# Altium PCB version_2.PcbDoc
Units mil, origin at the board's own origin, x right, y up, seen from the top; angles counter-clockwise.
Board outline 3930.36 x 2285 mil, 2 copper layers (Top Layer, Bottom Layer); 63 components, 60 nets, 290 pads, 52 vias.
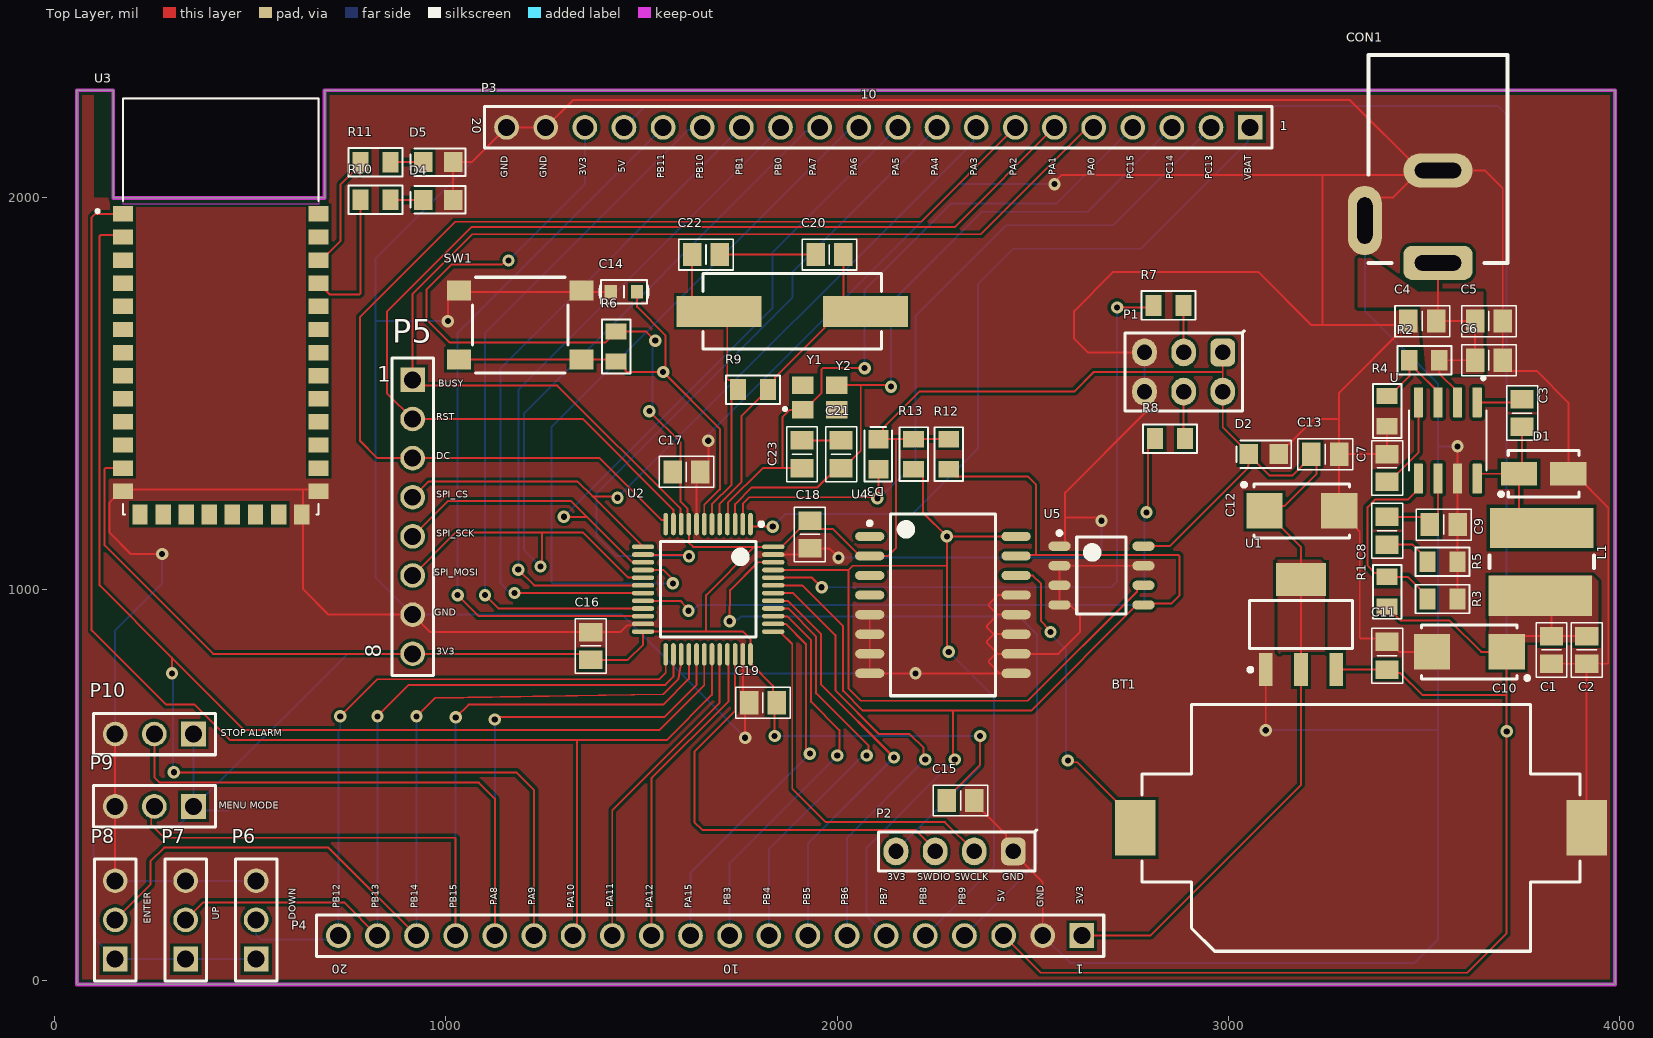
[diagram p0: Top Layer view]
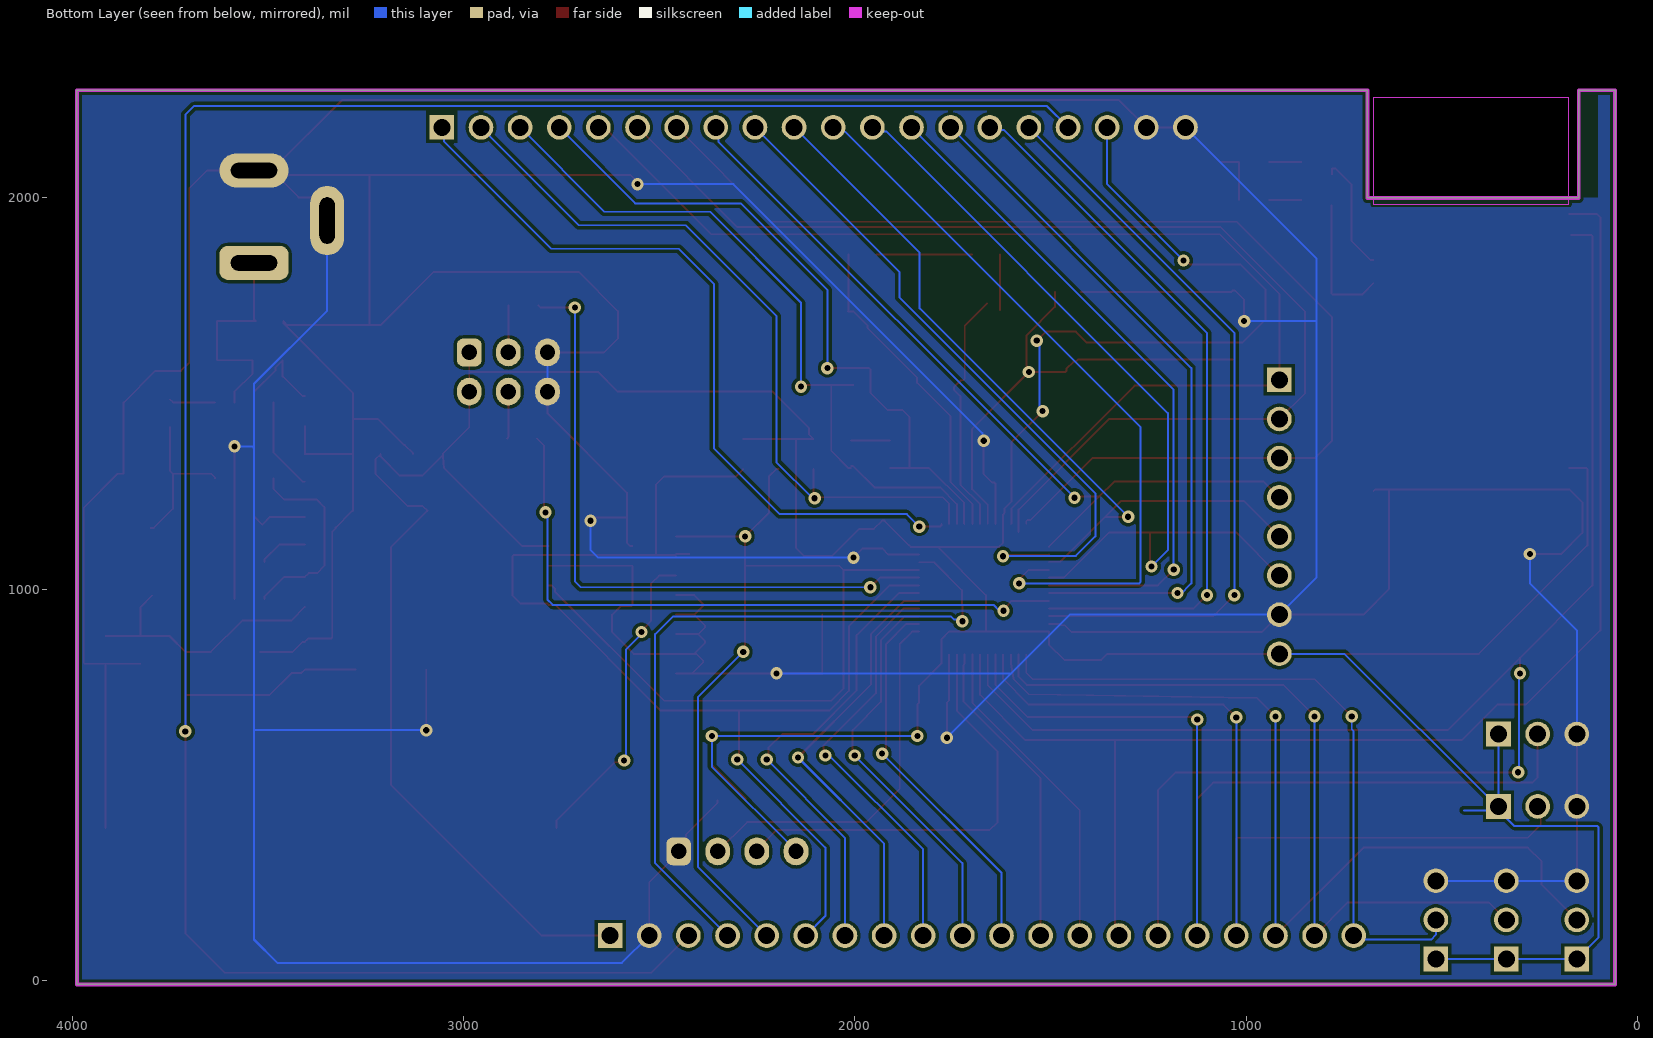
[diagram p1: Bottom Layer view, seen from below]

## Layer stack, top to bottom
Top Solder: solder mask 0.4, Solder Resist, Dk 3.5
Top Layer: signal copper 1.4
Dielectric 1: dielectric 12.6, FR-4, Dk 4.8
Bottom Layer: signal copper 1.4
Bottom Solder: solder mask 0.4, Solder Resist, Dk 3.5

## Board outline
57.14,-10 57.14,2275 150,2275 150,2000 690,2000 690,2275 3987.5,2275 3987.5,-10

## Design rules (kind name [scope] priority, off if disabled: settings)
Clearance [All] p1: gap=8 ignorepadtopadclearanceinfootprint=TRUE
PolygonConnect [All] p1: connectstyle=Direct reliefconductorwidth=10 reliefentries=4 polygonreliefangle="90 Angle" airgapwidth=10
RoutingVias [All] p1: holewidth=15.75 width=31.5 viastyle="Through Hole" minholewidth=15.75 minwidth=31.5 maxholewidth=15.75 maxwidth=31.5
SolderMaskExpansion [All] p1: expansion=4 istentingtop=FALSE
Width [All] p1: maxlimit=50 minlimit=5 preferedwidth=10
30 further rules are at their usual default settings.

## Classes and differential pairs
component class 06_I2C_DS3231: BT1 R12 R13 U4 U5
component class 05_Uart_Bluetooth: D4 D5 P5 P6 P7 P8 P9 P10 R10 R11 U3
component class 04: C14 C15 C16 C17 C18 C19 C20 C21 C22 C23 D2 D3 P1 P2 P3 P4 R6 R7 R8 R9 SW1 U2 Y1 Y2
component class 03_Power_supply: C1 C2 C3 C4 C5 C6 C7 C8 C9 C10 C11 C12 C13 CON1 D1 L1 R1 R2 R3 R4 R5 U U1

## Components (designator, comment, footprint, x,y, rotation, side; value= is the part's Value field where it differs from the comment)
BT1 "79527141" 79527141 3338.23,390 r180 top
C1 "47uF" "C 0805" 3825,845 r90 top
C2 "47uF" "C 0805" 3915,845 r90 top
C3 "0.1uF" "C 0805" 3750,1450 r90 top
C4 "10uf" "C 0805" 3495,1685 r0 top
C5 "10uf" "C 0805" 3665,1685 r180 top
C6 "0.01uF" "C 0805" 3665,1585 r180 top
C7 "0.01uF" "C 0805" 3405,1310 r270 top
C8 "1000pF" "C 0805" 3405,1149.57 r90 top
C9 "47pF" "C 0805" 3549.57,1165 r180 top
C10 "22uF" "C SMD TAN 2312 (C)" 3615,840 r180 top
C11 "100nF" "C 0805" 3405,830 r270 top
C12 "22uF" "C SMD TAN 2312 (C)" 3186.97,1200 r0 top
C13 "100nF" "C 0805" 3247.01,1345 r180 top
C14 "C" "C 0603" 1455,1760 r180 top
C15 "104" "C 0805" 2315,460 r0 top
C16 "104" "C 0805" 1370,855 r270 top
C17 "104" "C 0805" 1614.57,1300 r180 top
C18 "104" "C 0805" 1930,1140 r90 top
C19 "104" "C 0805" 1810,710 r0 top
C20 "20p" "C 0805" 1980,1855 r180 top
C21 "20p" "C 0805" 2010,1345 r90 top
C22 "20p" "C 0805" 1664.57,1855 r0 top
C23 "20p" "C 0805" 1910,1345 r90 top
CON1 "CON DC PWR" CONN/DC/PWR/5.0MM 3535,1833.78 r270 top
D1 "SS54F" "DO-214AC (SMA)" 3805,1295 r180 top
D2 "Led" "Led 0805" 3090,1345 r0 top
D3 "Led" "Led 0805" 2105,1345 r270 top
D4 "Led" "Led 0805" 980,1995 r0 top
D5 "Led" "Led 0805" 980,2091.22 r0 top
L1 "10uh" "Inductor SMD CDRH3D67" 3800,1070 r270 top
P1 "Header 3X2" HDR/Header/6/DL 2885,1555 r180 top
P2 "Header 4" HDR/Header/4 2300,330 r180 top
P3 "3A, 250 V (AC)" 61302011121 2105,2180 r180 top
P4 "3A, 250 V (AC)" 61302011121 1675,115 r180 top
P5 "3A, 250 V (AC)" 61300811121 915,1185 r270 top
P6 "3A, 250 V (AC)" 61300311121 515,155 r90 top
P7 "3A, 250 V (AC)" 61300311121 335,155 r90 top
P8 "3A, 250 V (AC)" 61300311121 155,155 r90 top
P9 "3A, 250 V (AC)" 61300311121 255,445 r180 top
P10 "3A, 250 V (AC)" 61300311121 255,630 r180 top
R1 "8.2k" "R 0805" 3405,993.39 r270 top
R2 "100k" "R 0805" 3500,1585 r0 top
R3 "1.6k" "R 0805" 3546.61,975 r180 top
R4 "20k" "R 0805" 3405,1455 r90 top
R5 "30k" "R 0805" 3546.61,1070 r180 top
R6 "10k" "R 0805" 1435,1620 r270 top
R7 "100k" "R 0805" 2846.61,1725 r180 top
R8 "R" "R 0805" 2850,1385 r0 top
R9 "R" "R 0805" 1785,1510 r0 top
R10 "470" "R 0805" 820,1995 r180 top
R11 "470" "R 0805" 820,2091.22 r180 top
R12 "10k" "R 0805" 2285,1345 r270 top
R13 "4.7k" "R 0805" 2195,1345 r270 top
SW1 "430152043826" WS-TASV_L6W6H4.3_4301x20438x6 1190,1675 r0 top
U "TPS54231D" SOIC127P599X175-8N 3560,1380 r270 top
U1 "AMS1117-3.3V, 1A" "AMS1117-3.3V SOT223" 3185,909.92 r90 top
U2 "STM32F103C8T6" STM32F103C8T6 1670,1000 r270 top
U3 "HC-05" XCVR_HC-05 425,1710 r0 top
U4 "DS3231SN" DS3231SN-16SOIC 2270,960 r0 top
U5 "AT24C512C-SSHD-T" M24M01-RMN6TP 2675,1035 r0 top
Y1 "32MHz" WE-XTAL_CFPX-180 1955,1490 r0 top
Y2 "8MHz" WE-XTAL_HC49/4HSMX 1885,1710 r0 top

## Footprints (in the part's own frame and the unit in brackets; to place one, negate y for a bottom-side part, rotate by r counter-clockwise, add the part's x,y. Pads: shape width x height; smd on the part's side, far side on the other; paste and mask are expansions set on the pad)
79527141 [mm] "Battery Holder"
  rect 2.6x3.6 smd: 1(14.65,0) 2(-14.65,0)
  silkscreen extent -14.2,-8 14.2,8, body extent -15.95,-8 15.95,8, height 5.66
61300311121 [mm] "Pin Header, pitch 2.54 mm, THT, Vertical, single row, 3p"
  rect 1.6x1.6 hole 1.1: 1(-2.54,0)
  round 1.6 hole 1.1: 2(0,0) 3(2.54,0)
  silkscreen extent -3.96,-1.35 3.96,1.35, body extent -3.81,-1.27 3.81,1.27, height 8.57
61300811121 [mm] "Pin Header, pitch 2.54 mm, THT, Vertical, single row, 8p"
  rect 1.6x1.6 hole 1.1: 1(-8.89,0)
  round 1.6 hole 1.1: 2(-6.35,0) 3(-3.81,0) 4(-1.27,0) 5(1.27,0) 6(3.81,0) 7(6.35,0) 8(8.89,0)
  silkscreen extent -10.31,-1.35 10.31,1.35, body extent -10.16,-1.27 10.16,1.27, height 8.57
61302011121 [mm] "Pin Header, pitch 2.54 mm, THT, Vertical, single row, 20p"
  rect 1.6x1.6 hole 1.1: 1(-24.13,0)
  round 1.6 hole 1.1: 2(-21.59,0) 3(-19.05,0) 4(-16.51,0) 5(-13.97,0) 6(-11.43,0) 7(-8.89,0) 8(-6.35,0) 9(-3.81,0) 10(-1.27,0) 11(1.27,0) 12(3.81,0) 13(6.35,0) 14(8.89,0) 15(11.43,0) 16(13.97,0) 17(16.51,0) 18(19.05,0) 19(21.59,0) 20(24.13,0)
  silkscreen extent -25.55,-1.35 25.55,1.35, body extent -25.4,-1.27 25.4,1.27, height 8.57
"AMS1117-3.3V SOT223" [mm] "SOT223, 4-Leads, Body 6.51x7.00mm, Pitch 2.29mm"
  rect 2.15x0.9 smd: 1(-2.93,2.29) 2(-2.93,0) 3(-2.93,-2.29)
  rect 2.15x3.25 smd: 4(2.93,0)
  silkscreen extent -3.05,-3.35 1.55,3.41, body extent -3.5,-3.35 3.5,3.35, height 1.8
"C 0603" [mm] "Chip Capacitor, 2-Leads, Body 1.6x0.8mm, IPC Medium Density"
  rect 0.8x0.85 smd: 1(-0.85,0) 2(0.85,0)
  silkscreen extent -1.6,-0.75 1.6,0.75, body extent -0.8,-0.43 0.8,0.43, height 0.81
"C 0805" [mm] "Chip Capacitor, 2-Leads, Body 2.0x1.3mm, IPC Medium Density"
  rect 1.2x1.5 smd: 1(-0.9,0) 2(0.9,0)
  silkscreen extent -1.78,-1 1.78,1, body extent -1,-0.64 1,0.61, height 0.6
"C SMD TAN 2312 (C)" [mm] "Molded Capacitor, 2-Leads, Body 6.0x3.2mm, IPC Medium Density"
  rect 2.35x2.3 smd: 1(-2.425,0) 2(2.425,0)
  silkscreen extent -3.88,-1.75 3.1,1.82, body extent -3.09,-1.58 3.09,1.63, height 2.68
CONN/DC/PWR/5.0MM [mm]
  rrect50% 2.2x4.5 hole 1 slot 3 at 90 deg: 1(0,0)
  oval 2.2x4.5 hole 1 slot 3 at 90 deg: 2(-6,0)
  oval 4.5x2.2 hole 1 slot 3 at 0 deg: 3(-2.75,-4.75)
  silkscreen extent -13.5,-4.5 0,4.5, body extent -13.58,-5 0.25,4.5, height 11.02
"DO-214AC (SMA)" [mm] "Molded Diode, 2-Leads, Body 4.3x2.7mm, IPC Medium Density"
  rect 2.35x1.55 smd: 1(-1.6,0) 2(1.6,0)
  silkscreen extent -2.3,-1.5 2.89,1.5, body extent -2.6,-1.3 2.6,1.3, height 2.4
DS3231SN-16SOIC [mm] "SOIC, 16-Leads, Body 11.55x7.50mm, Pitch 1.27mm, IPC Medium Density"
  oval 1.9x0.6 smd: 1(-4.75,4.445) 2(-4.75,3.175) 3(-4.75,1.905) 4(-4.75,0.635) 5(-4.75,-0.635) 6(-4.75,-1.905) 7(-4.75,-3.175) 8(-4.75,-4.445) 9(4.75,-4.445) 10(4.75,-3.175) 11(4.75,-1.905) 12(4.75,-0.635) 13(4.75,0.635) 14(4.75,1.905) 15(4.75,3.175) 16(4.75,4.445)
  silkscreen extent -4.87,-5.9 3.4,5.9, body extent -5.16,-5.9 5.16,5.9, height 2.65
HDR/Header/4 [mm]
  rrect50% 1.6x1.8 hole 1: 1(-3.81,0)
  oval 1.6x1.8 hole 1: 2(-1.27,0) 3(1.27,0) 4(3.81,0)
  silkscreen extent -5.33,-1.4 4.95,1.27, body extent -5.08,-1.27 5.08,1.27, height 8.89
HDR/Header/6/DL [mm]
  rrect50% 1.6x1.8 hole 1: 1(-2.54,-1.27)
  oval 1.6x1.8 hole 1: 2(-2.54,1.27) 3(0,-1.27) 4(0,1.27) 5(2.54,-1.27) 6(2.54,1.27)
  silkscreen extent -3.94,-2.67 3.81,2.54, body extent -3.81,-2.54 3.81,2.54, height 8.89
"Inductor SMD CDRH3D67" [mm] "Precision Wire Wound Inductor, 2-Leads, Body 10.0x8.0mm, IPC Low Density"
  rect 2.6x6.7 smd: 1(-2.2,0) 2(2.2,-0.1)
  silkscreen extent -0.4,-3.4 0.4,3.4, body extent -3.35,-3.35 3.35,3.35, height 2.9
"Led 0805" [mm] "Led SMD 0805"
  rect 1.2x1.3 smd: 1(-0.975,0) 2(0.975,0)
  silkscreen extent -1.78,-0.89 1.78,0.89, body extent -1.01,-0.64 1.01,0.61, height 1.1
M24M01-RMN6TP [mm] "SOIC, 8-Leads, Body 4.90x3.90mm, Pitch 1.27mm, IPC Medium Density"
  oval 1.45x0.6 smd: 1(-2.725,1.905) 2(-2.725,0.635) 3(-2.725,-0.635) 4(-2.725,-1.905) 5(2.725,-1.905) 6(2.725,-0.635) 7(2.725,0.635) 8(2.725,1.905)
  silkscreen extent -2.85,-2.5 1.6,2.88, body extent -3,-2.5 3,2.5, height 1.25
"R 0805" [mm] "Chip Resistor, 2-Leads, Body 2.0x1.3mm, IPC Medium Density"
  rect 1.05x1.35 smd: 1(-0.975,0) 2(0.975,0)
  silkscreen extent -1.75,-0.92 1.75,0.92, body extent -1,-0.61 1,0.59, height 0.5
SOIC127P599X175-8N [mm]
  rrect25% 1.97x0.6 smd: 1(-2.47,1.905) 2(-2.47,0.635) 3(-2.47,-0.635) 4(-2.47,-1.905) 5(2.47,-1.905) 6(2.47,-0.635) 7(2.47,0.635) 8(2.47,1.905)
  silkscreen extent -4.14,-2.52 1.95,2.52
STM32F103C8T6 [mm] "TSQFP, 48-Leads, Body 7.00x7.00mm, Pitch 0.50mm, IPC Medium Density"
  oval 1.45x0.3 smd: 1(-4.225,2.75) 2(-4.225,2.25) 3(-4.225,1.75) 4(-4.225,1.25) 5(-4.225,0.75) 6(-4.225,0.25) 7(-4.225,-0.25) 8(-4.225,-0.75) 9(-4.225,-1.25) 10(-4.225,-1.75) 11(-4.225,-2.25) 12(-4.225,-2.75) 25(4.225,-2.75) 26(4.225,-2.25) 27(4.225,-1.75) 28(4.225,-1.25) 29(4.225,-0.75) 30(4.225,-0.25) 31(4.225,0.25) 32(4.225,0.75) 33(4.225,1.25) 34(4.225,1.75) 35(4.225,2.25) 36(4.225,2.75)
  oval 0.3x1.45 smd: 13(-2.75,-4.225) 14(-2.25,-4.225) 15(-1.75,-4.225) 16(-1.25,-4.225) 17(-0.75,-4.225) 18(-0.25,-4.225) 19(0.25,-4.225) 20(0.75,-4.225) 21(1.25,-4.225) 22(1.75,-4.225) 23(2.25,-4.225) 24(2.75,-4.225) 37(2.75,4.225) 38(2.25,4.225) 39(1.75,4.225) 40(1.25,4.225) 41(0.75,4.225) 42(0.25,4.225) 43(-0.25,4.225) 44(-0.75,4.225) 45(-1.25,4.225) 46(-1.75,4.225) 47(-2.25,4.225) 48(-2.75,4.225)
  silkscreen extent -4.35,-3.1 3.1,3.58, body extent -4.5,-4.5 4.5,4.5, height 1.6
WE-XTAL_CFPX-180 [mm] "Quartz Crystal, size CFPX-180, body 3.4x2.7mm"
  rect 1.4x1.15 smd: 1(-1.1,-0.8) 2(1.1,-0.8) 3(1.1,0.8) 4(-1.1,0.8)
  silkscreen extent -2.35,-0.85 -2.15,-0.65, body extent -1.7,-1.35 1.7,1.35, height 0.65
WE-XTAL_HC49/4HSMX [mm] "Quartz Crystal, size HC49/4HSMX, body 11.4x4.9mm"
  rect 5.5x2 smd: 1(-4.75,0) 2(4.75,0)
  silkscreen extent -5.8,-2.45 5.8,2.45, body extent -6.7,-2.45 6.7,2.45, height 4.3
WS-TASV_L6W6H4.3_4301x20438x6 [mm] "SMD Tact Switch, body 6x6mm"
  rect 1.55x1.3 smd: A1(-3.975,2.25) A2(3.975,2.25) B1(-3.975,-2.25) B2(3.975,-2.25)
  silkscreen extent -3.1,-3.1 3.1,3.1, body extent -4.5,-3.1 4.5,3.1, height 4.3
XCVR_HC-05 [mm]
  rect 1.3x1 smd: 1(-6.35,6.325) 2(-6.35,4.825) 3(-6.35,3.325) 4(-6.35,1.825) 5(-6.35,0.325) 6(-6.35,-1.175) 7(-6.35,-2.675) 8(-6.35,-4.175) 9(-6.35,-5.675) 10(-6.35,-7.175) 11(-6.35,-8.675) 12(-6.35,-10.175) 13(-6.35,-11.675) 22(6.35,-11.675) 23(6.35,-10.175) 24(6.35,-8.675) 25(6.35,-7.175) 26(6.35,-5.675) 27(6.35,-4.175) 28(6.35,-2.675) 29(6.35,-1.175) 30(6.35,0.325) 31(6.35,1.825) 32(6.35,3.325) 33(6.35,4.825) 34(6.35,6.325)
  rect 1x1.3 smd: 14(-5.25,-13.175) 15(-3.75,-13.175) 16(-2.25,-13.175) 17(-0.75,-13.175) 18(0.75,-13.175) 19(2.25,-13.175) 20(3.75,-13.175) 21(5.25,-13.175)
  Keep-Out Layer region: 6.35,6.95 -6.35,6.95 -6.35,13.85 6.35,13.85
  Keep-Out Layer region: 6.35,6.95 -6.35,6.95 -6.35,13.85 6.35,13.85
  silkscreen extent -8.1,-13.18 6.35,13.82

## Part data
BT1: "WA-BCPH Battery Holder, SMT, battery type 2032", Manufacturer="Wurth Elektronik", Operating Temperature Max=105°C, Operating Temperature Min=-40°C, Battery Type=2032, Category="Battery Holders", ComponentLink1Description="Website Link", ComponentLink1URL=https://www.we-online.com/redexpert/article/79527141?ad, ComponentLink2Description="Datasheet Link", ComponentLink2URL=https://www.we-online.com/redexpert/spec/79527141?ad, Manufacturer Part Number=79527141, Match Code=WA-BCPH, Mount="Surface Mount", Packaging="Tape and Reel"
C1 C2 C3 C4 C5 C6 C7 C8 C9 C11 C13 C14 C15 C16 C17 C18 C19 C20 C21 C22 C23: library part "Capacitor NP", "Capacitor non-pol"
C10 C12: library part Capacitor, "Capacitor pol"
CON1: "DC input connector"
D1: library part "Diode Schottky", "Schottky Diode"
D2 D3 D4 D5: "Typical LED"
L1: library part Inductor, "Inductor"
P1: "Header, 3-Pin, Dual row"
P2: "Header, 4-Pin"
P3 P4: library part 61302011121, "WR-PHD Pin Header, THT, pitch 2.54mm, Single Row, Vertical, 20p", Contact Resistance=20mOhm, LCSC Part #=N/A, Manufacturer="Wurth Elektronik", Operating Temperature Max="+ 85 C", Operating Temperature Min="- 25 C", Rated Current=3A, Supplier 1 Part Number=710-61302011121, Withstanding Voltage=500VAC, Working Voltage=250VAC, ComponentLink1Description=Datasheet, ComponentLink1URL=https://www.we-online.com/catalog/datasheet/61302011121.pdf, Gender="Pin Header", Manufacturer Part Number=61302011121, Mount=THT, Orientation=Vertical, Packaging=Bag, Pin Number=20, Pitch=2.54mm, Published Date="May 2020", Row Number=Single, Supplier 1=Mouser, Supplier 1 URL=https://www.mouser.vn/ProductDetail/Wurth-Elektronik/61302011121?qs=PhR8RmCirEbj%2FFsnpbhNaw%3D%3D, Supplier 2=Digi-Key, Supplier 2 Part Number=N/A, Supplier 2 URL=N/A, Supplier 3=thegioiic, Supplier 3 Part Number=N/A, Supplier 3 URL=N/A
P5: library part 61300811121, "WR-PHD Pin Header, THT, pitch 2.54mm, Single Row, Vertical, 8p", Contact Resistance=20mOhm, LCSC Part #=N/A, Manufacturer="Wurth Elektronik", Operating Temperature Max="+ 85 C", Operating Temperature Min="- 25 C", Rated Current=3A, Supplier 1 Part Number=710-61300811121, Withstanding Voltage=500VAC, Working Voltage=250VAC, ComponentLink1Description=Datasheet, ComponentLink1URL=https://www.we-online.com/catalog/datasheet/61300811121.pdf, Gender="Pin Header", Manufacturer Part Number=61300811121, Mount=THT, Orientation=Vertical, Packaging=Bag, Pin Number=8, Pitch=2.54mm, Published Date="May 2020", Row Number=Single, Supplier 1=Mouser, Supplier 1 URL=https://www.mouser.vn/ProductDetail/Wurth-Elektronik/61300811121?qs=PhR8RmCirEZRdx%252BVlEmRRA%3D%3D, Supplier 2=Digi-Key, Supplier 2 Part Number=N/A, Supplier 2 URL=N/A, Supplier 3=thegioiic, Supplier 3 Part Number=N/A, Supplier 3 URL=N/A
P6 P7 P8 P9 P10: library part 61300311121, "WR-PHD Pin Header, THT, pitch 2.54mm, Single Row, Vertical, 3p", Contact Resistance=20mOhm, LCSC Part #=C2937625, Manufacturer="Wurth Elektronik", Operating Temperature Max="+ 85 C", Operating Temperature Min="- 25 C", Rated Current=3A, Supplier 1 Part Number=710-61300311121, Supplier 2 Part Number=N/A, Withstanding Voltage=500VAC, Working Voltage=250VAC, ComponentLink1Description=Datasheet, ComponentLink1URL=https://www.we-online.com/catalog/datasheet/61300311121.pdf, Gender="Pin Header", Manufacturer Part Number=61300311121, Mount=THT, Orientation=Vertical, Packaging=Bag, Pin Number=3, Pitch=2.54mm, Published Date="May 2020", Row Number=Single, Supplier 1=Mouser, Supplier 1 URL=https://www.mouser.vn/ProductDetail/Wurth-Elektronik/61300311121?qs=PhR8RmCirEYxRWFJzNKsUw%3D%3D, Supplier 2=Digi-Key, Supplier 2 URL=N/A, Supplier 3=thegioiic, Supplier 3 Part Number=N/A, Supplier 3 URL=N/A
R1 R2 R3 R4 R5 R6 R7 R8 R9 R10 R11 R12 R13: library part Resistor, "Resistor"
SW1: "WS-TASV SMT Tact Switch, L6 x W6 x H4.3mm, 260g, SPST-NO, 12V, 50mA", LCSC Part #=N/A, Manufacturer="Wurth Elektronik", Operating Temperature Max=85°C, Operating Temperature Min=-40°C, Package / Case=0805, Rated Current=50mA, Rated Voltage=12VDC, Supplier 1 Part Number=710-430152043826, Supplier 2 Part Number=732-6991-2-ND, Supplier 3 Part Number=OEM, Category="Tact Switches", Circuit=SPST-NO, ComponentLink1Description=Datasheet, ComponentLink1URL=https://www.we-online.com/redexpert/spec/430152043826?ad, Contact Material="Stainless Steel", Height=4.3mm, Length=6mm, Manufacturer Part Number=430152043826, Match Code=WS-TASV, Mount="Surface Mount", Operation Force=260g, Packaging="Tape and Reel", Supplier 1=Mouser, Supplier 1 URL=https://www.mouser.vn/ProductDetail/Wurth-Elektronik/430152043826?qs=wr8lucFkNMUjBcFj1giTsA%3D%3D, Supplier 2=Digi-Key, Supplier 2 URL=https://www.digikey.com/en/products/detail/w%C3%BCrth-elektronik/430152043826/5208994, Supplier 3=thegioiic, Supplier 3 URL=https://www.thegioiic.com/nut-nhan-6x6mm-cao-4-3mm-4-chan-smd, Terminal Material="Copper Alloy", Terminal Plating=Silver, Washable=No, Width=6mm
U: "å…·æœ‰Eco-modeï¼†tradeçš„3.5è‡³28Vè¾“å…¥ï¼Œ2Aï¼Œ570kHzé™åŽ‹è½¬æ¢å™¨ï¼›8-SOIC -40è‡³150", PACKAGE="SOIC-8 Texas Instruments", Availability=Unavailable, DigiKey-Purchase-URL=https://snapeda.com/shop?store=DigiKey&id=456068, MF="Texas Instruments", MP=TPS54231D, Price=None, SnapEDA_Link=https://www.snapeda.com/parts/TPS54231D/Texas%20Instruments/view-part/456068/?ref=snap, Texas_Instruments-Purchase-URL=https://snapeda.com/shop?store=Texas+Instruments&id=456068
U1: library part AMS1117-3.3V, "1A 60dB@(120Hz) Fixed 3.3V Positive electrode 12V SOT-223 Linear Voltage Regulators (LDO) ROHS", Current Input Maximum=N/A, Current Output Maximum=1A, LCSC Part #=C347222, Manufacturer=AMS, Operating Temperature Max="+ 85 C", Operating Temperature Min="- 40 C", Voltage Input Maximum=15V, Voltage Output=3.3V, ComponentLink1Description=Datasheet, ComponentLink1URL=http://www.advanced-monolithic.com/pdf/ds1117.pdf, Manufacturer Part Number=N/A, Mount=SMD/SMT, Packaging="Tape and Reel", Pad Count=4, Supplier 1=Mouser, Supplier 1 Part Number=N/A, Supplier 1 URL=N/A, Supplier 2=Digi-Key, Supplier 2 Part Number=N/A, Supplier 2 URL=N/A, Supplier 3=thegioiic, Supplier 3 Part Number=N/A, Supplier 3 URL=https://www.thegioiic.com/ams1117-3-3v-ic-on-ap-3-3v-1a-sot-223
U2: "ARM Microcontrollers - MCU 32BIT Cortex M3 64KB 20KB RAM 2X12 ADC", LCSC Part #=C8734, Manufacturer=STMicroelectronics, Manufacturer Part Number=STM32F103C8T6TR, Operating Temperature Max="+ 85 C", Operating Temperature Min="- 40 C", Package / Case=LQFP48, Supplier 1 Part Number=511-STM32F103C8T6, Supplier 2 Part Number=497-17666-2-ND, Supply Voltage - Max="3.6 V", Supply Voltage - Min="2 V", ComponentLink1Description=Datasheet, ComponentLink1URL=https://www.mouser.com/datasheet/2/389/stm32f103c8-1851025.pdf, Mount=SMD/SMT, Packaging="Tape and Reel", Pad Count=48, Part Number=STM32F103C8T6, Supplier 1=Mouser, Supplier 1 URL=https://www.mouser.com/ProductDetail/STMicroelectronics/STM32F103C8T6?qs=bhCVus9SdFtq6kqxsU5%2FDA%3D%3D, Supplier 2=Digi-Key, Supplier 2 URL=https://www.digikey.com/en/products/detail/stmicroelectronics/stm32f103c8t6tr/2122442, Supplier 3=thegioiic, Supplier 3 Part Number=STM32F103C8T6, Supplier 3 URL=https://www.thegioiic.com/stm32f103c8t6-32-bit-arm-cortex-m3-microcontroller-72mhz-64kb-flash-48-lqfp
U3: "Bluetooth to Serial Port Module", PACKAGE=None, Availability=Unavailable, MP=HC-05, Price=None
U4: library part DS3231SN-16SOIC, "IC RTC CLK/CALENDAR I2C 16SOIC", LCSC Part #=N/A, Manufacturer="Analog Devices Inc./Maxim Integrated", Operating Supply Current="110 - 170 (µA)", Operating Temperature Max="+ 85 C", Operating Temperature Min="- 40 C", Package / Case=SOIC-16, Supplier 1 Part Number=700-DS3231SN-, Supplier 2 Part Number=DS3231SN#-ND, Supply Voltage - Max="5.5 V", Supply Voltage - Min="2.3 V", ComponentLink1Description=Datasheet, ComponentLink1URL=https://www.analog.com/media/en/technical-documentation/data-sheets/DS3231.pdf, Manufacturer Part Number=DS3231SN, Mount=SMD/SMT, Packaging="Tape and Reel", RTC Bus Interface="I2C, Serial", RTC Memory Size=N/A, Supplier 1=Mouser, Supplier 1 URL=https://www.mouser.com/ProductDetail/Analog-Devices-Maxim-Integrated/DS3231SN?qs=ffX8NcjNb2RmKAb9wAk9Ug%3D%3D, Supplier 2=Digi-Key, Supplier 2 URL=https://www.digikey.com/en/products/detail/analog-devices-inc-maxim-integrated/DS3231SN/1197576, Supplier 3=thegioiic, Supplier 3 Part Number=N/A, Supplier 3 URL=https://www.thegioiic.com/ds3231sn-ic-rtc-clock-calendar-16-soic, Time Format="HH:MM:SS (12 hr, 24 hr)"
U5: "EEPROM SERIAL EEPROM 512K (64K X 8) 2WIRE 2.5V", LCSC Part #=C12371, Manufacturer=Microchip, Maximum Clock Frequency="1 MHz", Operating Temperature Max="+ 85 C", Operating Temperature Min="- 40 C", Package / Case=SOIC-8, Supplier 1 Part Number=556-AT24C512C-SSHD-T, Supplier 2 Part Number=AT24C512C-SSHD-TTR-ND, Supply Voltage - Max="5.5 V", Supply Voltage - Min="2.5 V", ComponentLink1Description=Datasheet, ComponentLink1URL=https://www.mouser.vn/datasheet/2/268/AT24C512C_I_c2_b2C_Compatible__Two_Wire__Serial_EE-2306430.pdf, Interface Type="2-Wire, I2C", Manufacturer Part Number=AT24C512C-SSHD-T, Memory Size="512 kbit", Mount=SMD/SMT, Packaging="Tape and Reel", Supplier 1=Mouser, Supplier 1 URL=https://www.mouser.vn/ProductDetail/Microchip-Technology/AT24C512C-SSHD-T?qs=Oaf4mloV4cM7Q6xetGfOtg%3D%3D, Supplier 2=Digi-Key, Supplier 2 URL=https://www.digikey.com/en/products/detail/microchip-technology/at24c512c-sshd-t/3046245, Supplier 3=thegioiic, Supplier 3 Part Number=AT24C512C-SSHD-T, Supplier 3 URL=https://www.thegioiic.com/at24c512c-sshd-t-ic-eeprom-512kbit-8-soic
Y1: library part 073525326010, "WE-XTAL Quartz Crystal, SMT, CFPX-180, 32MHz, +/-30ppm", Frequency Stability=+/-16ppm, Frequency Tolerance=+/-10ppm, LCSC Part #=N/A, Load Capacitance=9pF, Manufacturer=NDK, Manufacturer Part Number=NX3225SA-32MHZ-EXS00A-CS02368, Operating Temperature Max="+ 70 C", Operating Temperature Min="+ 20 C", Package / Case=CFPX-180/3525, Supplier 1 Part Number=344-NX3225SA32MHZEXS, Supplier 2 Part Number=644-1208-2-ND, ComponentLink1Description=Datasheet, ComponentLink1URL=https://www.mouser.com/datasheet/2/905/ndk_04232018_NX3225SA-32MHZ-EXS00A-CS02368-1324924.pdf, Frequency=32MHz, Mounting Technology=SMT, Packaging="Tape and Reel", Supplier 1=Mouser, Supplier 1 URL=https://www.mouser.com/ProductDetail/NDK/NX3225SA-32MHZ-EXS00A-CS02368?qs=55YtniHzbhCu90OOsHDzwg%3D%3D, Supplier 2=Digi-Key, Supplier 2 URL=https://www.digikey.com/en/products/detail/ndk-america-inc/nx3225sa-32mhz-exs00a-cs02368/3946316, Supplier 3=thegioiic, Supplier 3 Part Number=N/A, Supplier 3 URL=N/A
Y2: library part 071105086016, "WE-XTAL Quartz Crystal, SMT, HC49/4HSMX, 8MHz, +/-30ppm", Frequency Stability=+/-50ppm, Frequency Tolerance=+/-30ppm, Load Capacitance=16pF, Manufacturer="Wurth Elektronik", Manufacturer Part Number=830003151, Operating Temperature Max="+ 60 C", Operating Temperature Min="- 10 C", Package / Case=HC49/4HSMX, Supplier 1 Part Number=710-830003151, Supplier 2 Part Number=732-830003151TR-ND, Supplier 3 Part Number=N/A, ComponentLink1Description=Datasheet, ComponentLink1URL=https://katalog.we-online.com/pbs/datasheet/830003151.pdf, Frequency=8MHz, Mount=SMD/SMT, Packaging="Tape and Reel", Supplier 1=Mouser, Supplier 1 URL=https://www.mouser.com/ProductDetail/Wurth-Elektronik/830003151?qs=2WXlatMagcHisY7XHApyYg%3D%3D, Supplier 2=Digi-Key, Supplier 2 URL=https://www.digikey.com/en/products/detail/w%C3%BCrth-elektronik/830003151/13979296, Supplier 3=thegioiic, Supplier 3 URL=https://www.thegioiic.com/thach-anh-8mhz-2-chan-smd-hc49-s

## Via types
v1: diameter 31.5, hole 15.75, Top Layer to Bottom Layer, tented both sides, 52 vias

## Nets (pads, with @x,y where several pads share a name; then routed paths per layer and width w, separated by ;. In a path a pad name is that pad's centre, name@x,y a point inside that pad or via, vN(x,y) a via of type N, cw(c..) or ccw(c..) an arc to the next point about the centre after c; other vN are vias at no path point)
5V: C1.2 C2.2 C10.1 C11.2 L1.2 P3.17 P4.3 R1.2 U1.3 | length 7099.7
  Top Layer w5: P4.3 2520,20 3610,20 3710.47,120.47 v1(3710.47,636.76) 3710.47,730 ; U1.3 C11.2 3413.67,785.9 3439.1,785.9 3495,730 3710.47,730 ; R1.2 3440,920 3565,920 3645,840 C10.1@3709.49,840 ; L1.2 3825,954.45 C1.2 ; C2.2 C1.2 ; 3710.47,730 3710.47,770 C10.1 3750.91,880.43 C1.2
  Bottom Layer w5: P3.17 1510,2235 3688.02,2235 3710.47,2212.54 v1(3710.47,636.76)
BOOT0: R7.2 U2.44 | length 1690.3
  Top Layer w5: U2.44 1935.47,1029.53 v1(1960,1005) ; v1(2715,1720) 2803.23,1720 R7.2
  Bottom Layer w5: v1(1960,1005) 2700,1005 2715,1020 v1(2715,1720)
BOOT1: R8.1 U2.20 | length 1717.3
  Top Layer w5: U2.20 1503.9,970.24 1599.88,970.24 1602.81,967.31 v1(1620,945) ; 2793.44,1211.99 2793.44,1366.83 R8.1
  Bottom Layer w5: v1(1620,945) 1630.43,945 1645.43,960 2772.07,960 2785,972.93 2785,1190 2783.54,1188.54 2782.18,1188.54 v1(2790,1196.37)
GND: BT1.2 C1.1 C2.1 C4.1 C5.1 C6.1 C7.1 C9.1 C10.2 C11.1 C12.2 C13.1 C14.2 C15.2 C16.1 C17.1 C18.1 C19.1 CON1.2 CON1.3 D1.1 D2.2 D4.2 D5.2 P1.5 P1.6 P2.1 P3.19 P3.20 P4.2 P5.7 P6.3 P7.3 P8.3 P9.3 P10.3 R3.1 R4.1 R5.1 SW1.A1 SW1.A2 U1.1 U2.8 U2.23 U2.35 U2.47 U3.13 U3.21 U3.22 U4.5 U4.6 U4.7 U4.8 U4.9 U4.10 U4.11 U4.12 U4.13 U5.1 U5.2 U5.3 U5.4 U5.7 U.7 | length 25338
  Top Layer w5: P8.3 P9.3 P10.3 ; v1(275,1090) 195,1090 141,1144 141,1222.26 174.09,1255.35 632.07,1255.35 ; U3.22 670,1255.35 632.07,1255.35 ; v1(1005,1685) 1005,1735.08 1005.49,1735.57 1005.49,1740.49 1028.58,1763.58 SW1.A1 1037.09,1760 C14.2 ; D4.2 D5.2 1066.22,2091.22 P3.20 P3.19 1325,2250 3309.72,2250 CON1.2@3489.72,2070 ; U2.23 1479.18,911.42 1475.74,907.97 1462.97,907.97 1445.43,890.43 C16.1 959.57,890.43 P5.7 700,935 635,1000 635,1252.43 632.07,1255.35 ; U2.8 1640.47,1270.04 1643.55,1273.12 1649.31,1273.12 1670.43,1294.24 v1(1670.43,1379.57) ; U2.35 1758.58,715.98 1764.57,710 v1(1764.57,620.43) ; U2.47 1914.02,1088.58 C18.1 1979.36,1104.57 v1(2003.21,1080.71) ; U4.5 U4.6 U4.7 U4.8 v1(2200,785) 2415,785 ; C15.2 2350.43,454.09 2431.59,372.93 2431.59,348.41 P2.1 2450,326.06 2525,251.06 P4.2 ; U4.9 2415,785 ; U4.11 2400,885 ; U4.12 2410,935 ; U4.13 2410,985 2387.07,962.07 2387.07,957.93 2410,935 ; v1(2555,2035) 2555,2039.83 2573.78,2058.61 3240,2058.61 ; U5.1 2573.35,1110 2581.95,1118.6 2581.95,1182.78 ; v1(2675,1175) 2667.22,1182.78 2581.95,1182.78 ; U5.7 U5.2 U5.3 U5.4 2571.1,956.62 2598.38,956.62 2620,935 2620,890 2565,835 U4.10 2410,835 ; P1.6 2785,1450 2581.95,1246.95 2581.95,1182.78 ; P1.5 2640,1605 2605,1640 2605,1710.53 2704.47,1810 3076.72,1810 3211.72,1675 3240,1675 ; v1(3094.84,639.84) U1.1 ; D2.2 3128.39,1346.97 3149.51,1368.09 3151.48,1368.09 3218.39,1435 3282.44,1435 ; CON1.3 3347.99,1963.46 3385.69,2001.16 3420.88,2001.16 CON1.2@3478.33,2058.61 ; R4.1 C7.1 3404.57,1345 C13.1 ; C10.2 3436.34,840 3410.91,865.43 C11.1 3396.33,874.1 3337.93,874.1 3335,877.03 3335,1147.44 3326.2,1156.24 3326.2,1157.22 3283.43,1200 C12.2 C13.1 ; R3.1 R5.1 C9.1 U.7 v1(3585,1365) ; C1.1 C2.1 ; BT1.2 C2.1 ; 2400,885 2382.07,867.07 2382.07,862.93 2410,835 ; 2400,885 2382.07,902.93 2382.07,907.07 2410,935 ; 2410,835 2405,835 2387.07,817.07 2387.07,812.93 2415,785 ; 3240,1675 3449.57,1675 C4.1 3459.57,1679.09 3282.44,1501.97 3282.44,1435 ; 3240,1675 3240,2058.61 ; 3240,2058.61 CON1.2@3478.33,2058.61 ; C13.1 3282.44,1435 ; CON1.2@3478.33,2058.61 3523.61,2058.61 CON1.2 ; CON1.2@3478.33,2058.61 CON1.2@3489.72,2070 ; CON1.2@3489.72,2070 CON1.2 ; CON1.2 3655,2070 3700.43,2024.57 C5.1 C6.1 3700.43,1579.09 3721.56,1557.97 3787.03,1557.97 3867.99,1477.01 D1.1 3883.74,1295 3970,1208.74 3970,812.5 3967.07,809.57 C2.1
  Bottom Layer w5: P8.3 P7.3 P6.3 ; P10.3@162.5,622.5 P10.3 155,895.16 275,1015.16 v1(275,1090) ; v1(1005,1685) 820,1685 ; P3.20 820,1845 820,1685 ; v1(1670.43,1379.57) 1673.94,1383.07 1673.94,1398.94 2310,2035 v1(2555,2035) ; v1(1764.57,620.43) 1600,785 ; v1@2005,1080.71 2655.71,1080.71 2675,1100 v1(2675,1175) ; v1(2200,785) 1600,785 ; P4.2 2595,45 3475,45 3535,105 3535,640 ; P1.6 P1.5 ; v1(3094.84,639.84) 3534.84,639.84 3535,640 ; CON1.3 3347.99,1712.01 3535,1525 3535,1360 ; v1(3585,1365) 3540,1365 3535,1360 ; 820,1685 820,1030 P5.7 1450,935 1600,785 ; 3535,640 3535,1360
NetBT1_1: BT1.1 U4.14 | length 806.9
  Top Layer w5: U4.14 2500,1035 2520,1015 2520,919.5 2525.02,914.48 v1(2545.02,890.84) ; v1@2585,566.46 v1(2589.31,562.15) 2593.61,557.85 2613.3,557.85 2761.46,409.69 BT1.1
  Bottom Layer w5: v1(2545.02,890.84) 2545.02,884.98 2585,845 v1@2585,566.46
NetC3_1: C3.1 D1.2 L1.1 U.8 | length 404.6
  Top Layer w5: U.8 3635,1285.72 3644.28,1295 D1.2 ; C3.1 3750,1302.99 D1.2 ; L1.1 3790.69,1156.61 3742.01,1205.3 D1.2
NetC3_2: C3.2 U.1 | length 118.4
  Top Layer w5: U.1 3741.81,1477.24 C3.2
NetC7_2: C7.2 U.4 | length 239.3
  Top Layer w5: C7.2 3410.91,1274.57 3485,1348.66 U.4
NetC8_1: C8.1 R5.2 | length 125
  Top Layer w5: C8.1 3470,1114.13 3508.23,1075.91 R5.2
NetC8_2: C8.2 C9.2 U.6 | length 243.8
  Top Layer w5: C8.2 3494.13,1185 C9.2 3535,1185.87 U.6
NetC20_2: C20.2 C22.2 | length 244.6
  Top Layer w5: C22.2 C20.2
NetC21_2: C21.2 C23.2 | length 100
  Top Layer w5: C23.2 C21.2
NetD4_1: D4.1 R10.1 | length 83.2
  Top Layer w5: R10.1 D4.1
NetD5_1: D5.1 R11.1 | length 83.2
  Top Layer w5: R11.1 D5.1
NetP1_3: P1.3 R7.1 | length 120
  Top Layer w5: P1.3 R7.1
NetP1_4: P1.4 R8.2 | length 121.4
  Top Layer w5: P1.4 2885,1388.39 R8.2
NetR1_1: R1.1 R3.2 U.5 | length 517.8
  Top Layer w5: U.5 3485,1255.79 3458.25,1229.04 3374.04,1229.04 3355,1210 3355,1060 3373.85,1041.15 3395.63,1041.15 R1.1 3457.36,1031.77 3508.23,980.91 R3.2
NetR2_1: R2.1 R4.2 U.3 | length 256.7
  Top Layer w5: R4.2 3410.91,1493.39 3461.61,1544.09 R2.1 3479.78,1566.83 3479.78,1559.43 3535,1504.21 U.3
NetR10_2: R10.2 U3.31 | length 344.4
  Top Layer w5: U3.31 703.87,1752.98 779.19,1752.98 782.11,1755.91 R10.2@782.11,1980
NetR11_2: R11.2 U3.32 | length 301
  Top Layer w5: U3.32 680.91,1840.91 730.77,1890.77 730.77,2034.47 771.18,2074.88 780.07,2074.88 780.07,2060.07
OSCIN: C20.1 R9.2 U2.5 Y2.2 | length 828.6
  Top Layer w5: U2.5 1699.53,1217.91 1755,1273.38 1755,1441.61 1840.59,1527.2 1840.59,1540.65 1966.85,1666.91 1966.85,1673.13 2003.72,1710 2017.01,1710 2015.43,1711.57 C20.1
OSCOUT: C22.1 R9.1 U2.6 Y2.1 | length 770.8
  Top Layer w5: Y2.1@1629.13,1713.39 C22.1 ; Y2.1@1662.44,1729.63 1718.94,1673.13 1718.94,1537.67 1722.69,1533.93 1728.44,1533.93 1746.61,1515.76 R9.1 1730,1493.39 1730,1266.77 1679.84,1216.61 U2.6
PA0: P3.5 P5.1 U2.10 | length 2996.8
  Top Layer w5: U2.10 1599.8,1167.64 1599.8,1205.2 1285,1520 930,1520 P5.1 915,1755 1067,1907 2367,1907 2640,2180 P3.5
PA1: P3.6 P5.2 U2.11 | length 3021.9
  Top Layer w5: U2.11@1581.42,1145.54 1581.42,1203.58 1350,1435 P5.2 850,1500 850,1710 1065,1925 2300,1925 P3.6
PA2: P3.7 P5.3 U2.12 | length 3065.4
  Top Layer w5: U2.12 1561.73,1173.67 1558.59,1176.82 1551.26,1176.82 1393.07,1335 P5.3 825,1335 780,1380 780,1695 1024,1939 2214,1939 P3.7
PA3: P3.8 P5.4 U2.13 | length 2064.9
  Top Layer w5: P5.4 955,1275 1336.93,1275 1374.94,1236.99 ; v1(1438.3,1233.75) 1435.06,1236.99 1374.94,1236.99 ; U2.13 1374.94,1236.99
  Bottom Layer w5: v1(1438.3,1233.75) 2348.48,2143.93 2348.48,2173.48 P3.8
PA4: P3.9 U2.14 | length 1782.4
  Top Layer w5: U2.14 1504.96,1087.28 1618.25,1087.28 v1(1621.38,1084.15)
  Bottom Layer w5: v1(1621.38,1084.15) 1620.53,1085 1435,1085 1385,1135 1385,1245 1886.15,1746.15 1886.15,1811.15 P3.9
PA5: P3.10 P5.5 U2.15 | length 2097.6
  Top Layer w5: P5.5 1005,1225 1320,1225 1360,1185 ; v1(1301.5,1185) 1360,1185 ; U2.15 1502.36,1070.2 1474.8,1070.2 1360,1185
  Bottom Layer w5: v1(1301.5,1185) 1834.28,1717.78 1834.28,1859.28 P3.10
PA6: P3.11 U2.16 | length 1906.5
  Top Layer w5: U2.16 1555.79,1049.21 1580,1025 v1(1580,1015)
  Bottom Layer w5: v1(1580,1015) 1272.93,1015 1270,1017.93 1270,1415 2023.9,2168.9 2043.9,2168.9 P3.11
PA7: P3.12 P5.6 U2.17 | length 2236.6
  Top Layer w5: P5.6 1025,1145 1245,1145 ; v1@1238.5,1055 v1(1241.75,1058.25) 1245,1061.5 1245,1145 ; U2.17 1465.47,1029.53 1350,1145 1245,1145
  Bottom Layer w5: v1@1238.5,1061.5 1200,1100 1200,1450 1919.93,2169.93 1944.93,2169.93 P3.12
PA8: P4.16 P10.2 U2.29 | length 2538.4
  Top Layer w5: P10.2 255,520 269.33,505.67 ; 269.55,505.89 1084.11,505.89 1125,465 P4.16 ; v1@1125,661.5 v1(1125,667.21) 1125,672.93 1557.93,672.93 1640.47,755.47 U2.29
  Bottom Layer w5: P4.16 v1@1125,661.5
PA9: P4.15 U2.30 U3.2 | length 4379
  Top Layer w5: U3.2@170.38,1905 117.93,1905 115,1902.07 115,1010 300,825 ; v1(300,785) 300,825 ; v1(305,532.14) 1179.93,532.14 1225,487.07 P4.15 ; U2.30 1660.16,755.16 1545,640 485,640 300,825
  Bottom Layer w5: v1(300,785) 302.5,782.5 302.5,534.64 v1(305,532.14)
PA10: P4.14 U2.31 U3.1 | length 3495.1
  Top Layer w5: U3.1 104.02,1959.02 95,1950 95,895 285,705 357.84,705 447.84,615 1335,615 ; P4.14 1335,125 1335,615 ; U2.31 1679.84,729.84 1565,615 1335,615
PA11: P4.13 U2.32 | length 832.4
  Top Layer w5: P4.13 1425,435 1699.53,709.53 U2.32
PA12: P4.12 U2.33 | length 801.8
  Top Layer w5: P4.12 1525,516.62 1722.49,714.11 1722.49,805.9 1719.21,809.18 U2.33
PA15: P4.11 U2.38 | length 974.9
  Top Layer w5: U2.38 1868.58,911.42 1920,860 1920,592.18 v1@1931.09,581.09 ; v1(1930,580) v1@1932.18,580
  Bottom Layer w5: P4.11 1625,275 v1@1925,575
PB0: P3.13 U2.18 | length 1742.5
  Top Layer w5: v1(1185.02,1049.98) 1225.16,1009.84 U2.18
  Bottom Layer w5: v1@1185,1050.24 1185,1510 P3.13
PB1: P3.14 U2.19 | length 1798
  Top Layer w5: v1@1170,985 v1(1175.16,990.16) U2.19
  Bottom Layer w5: v1@1170,985 1140,1015 1140,1565 P3.14
PB3: P4.10 U2.39 | length 1022.8
  Top Layer w5: U2.39 1837.09,930.35 1872.38,930.35 1933,869.73 1933,712 2005.23,639.77 2005.23,580.23 v1(2000,575)
  Bottom Layer w5: P4.10 1725,300 v1(2000,575)
PB4: P4.9 U2.40 | length 1070.4
  Top Layer w5: U2.40 1874.21,950.79 1946,879 1946,734 2080,600 2080,580 v1(2075,575)
  Bottom Layer w5: P4.9 1825,335 2065,575 v1(2075,575)
PB5: P4.8 U2.41 | length 1095.9
  Top Layer w5: U2.41 1872.91,970.47 1959,884.38 1959,756 v1(2145,570)
  Bottom Layer w5: P4.8 1925,350 v1(2145,570)
PB6: P4.7 U2.42 | length 1194.9
  Top Layer w5: U2.42 1887.57,990.16 1995,882.73 1995,741.62 2106.62,630 2185,630 2220.43,594.57 2220.43,569.57 v1(2225,565)
  Bottom Layer w5: P4.7 2025,365 v1(2225,565)
PB7: P4.6 R12.2 U2.43 U4.15 U5.5 | length 3054.1
  Top Layer w5: U2.43 1910.16,1009.84 2015,905 2015,740 2065,690 2296.03,690 ; R12.2 2303.17,1288.44 2486.56,1288.44 2507.93,1267.07 2507.93,1087.07 ; v1(2300,565) 2296.03,568.97 2296.03,690 ; U4.15@2422.01,1090 U4.15@2457.01,1090 ; U4.15 2459.08,1087.07 2507.93,1087.07 ; 2296.03,690 2495.55,690 2765.55,960 U5.5 2785.45,963.16 2853.16,963.16 2875,985 2875,1084.14 2872.07,1087.07 2507.93,1087.07
  Bottom Layer w5: P4.6 2075,165 2075,340 v1(2300,565)
PB8: P4.5 R13.2 U2.45 U4.16 U5.6 | length 3173.1
  Top Layer w5: U2.45 1987.64,1049.21 ; 1988.14,1049.21 2029.21,1049.21 ; R13.2 2200.91,1306.61 2219.07,1288.44 2219.07,1195.93 v1(2280,1135) ; v1(2285,840) 2280,845 2280,1060 ; U4.16 v1(2280,1135) ; U5.6 2774.5,1010 2765.9,1001.4 2765.9,993.62 2487.28,715 2060,715 2029.21,745.79 2029.21,1049.21 ; 2029.21,1049.21 2040,1060 2280,1060 ; 2280,1060 v1(2280,1135)
  Bottom Layer w5: P4.5 2400,290 2400,725 v1(2285,840)
PB9: P4.4 U2.46 | length 1874.5
  Top Layer w5: v1(1725,917.98) 1726.46,997.92 1797.45,1068.9 U2.46
  Bottom Layer w5: v1(1725,917.98) 1730.07,923.05 1746.73,923.05 1753.68,930 2465,930 2510,885 2510,300 P4.4
PB10: P3.15 U2.21 | length 1860.3
  Top Layer w5: v1(1100,985) 1134.21,950.79 U2.21
  Bottom Layer w5: v1(1100,985) 1100,1655 1618.93,2173.93 1648.93,2173.93 P3.15
PB11: P3.16 U2.22 | length 1908.4
  Top Layer w5: v1(1030,985) 1083.9,931.1 U2.22
  Bottom Layer w5: v1(1030,985) 1030,1655 P3.16
PB12: P4.20 P6.2 U2.25 | length 1744.2
  Top Layer w5: v1(730,675) 825,770 1545,770 1561.73,786.73 U2.25
  Bottom Layer w5: P6.2 515,117.26 527.5,104.76 714.76,104.76 P4.20 725,637.26 730,642.26 v1(730,675)
PB13: P4.19 P7.2 U2.26 | length 1959.5
  Top Layer w5: P7.2 380,200 740,200 P4.19 ; v1(825,675) 905.67,755.67 1560.67,755.67 1581.42,776.42 U2.26
  Bottom Layer w5: P4.19 v1(825,675)
PB14: P4.18 P8.2 U2.27 | length 2303.6
  Top Layer w5: P8.2 245,245 245,305 280,340 700,340 P4.18 ; v1(925,675) 972.45,722.45 1554.97,731.58 1594.42,771.03 1601.1,811.02 U2.27
  Bottom Layer w5: P4.18 v1(925,675)
PB15: P4.17 P9.2 U2.28 | length 2346.9
  Top Layer w5: P9.2 247.1,437.1 247.1,397.9 280,365 1022.07,365 1025,362.07 P4.17 ; v1(1025.04,672.52) 1058.09,705 1555,705 1620.79,770.79 U2.28
  Bottom Layer w5: P4.17 v1(1025.04,672.52)
PC13: D3.2 P3.2 U2.2 | length 1946.6
  Top Layer w5: U2.2 1758.58,1218.58 1775,1235 2100,1235 v1(2102.5,1232.5) 2105,1230 D3.2
  Bottom Layer w5: v1@2105,1230 2200,1325 2200,1698.73 2431.27,1930 2705,1930 P3.2
PC14: C21.1 P3.3 U2.3 Y1.3 | length 1851.5
  Top Layer w5: U2.3 1738.9,1217.28 1781.62,1260 1949.53,1260 2004.09,1314.57 C21.1@2010,1314.57 ; Y1.3@2003.23,1521.31 2060,1521.31 ; C21.1 2015.91,1309.57 2060,1353.66 2060,1521.31 ; v1(2137.27,1517.73) 2133.69,1521.31 2060,1521.31
  Bottom Layer w5: v1(2137.27,1517.73) 2137.27,1732.27 2369.49,1964.49 2639.49,1964.49 P3.3
PC15: C23.1 P3.4 U2.4 Y1.1 | length 1765.4
  Top Layer w5: U2.4 1720.52,1167.64 1720.52,1220.52 1809.57,1309.57 1860,1309.57 ; C23.1 1860,1309.57 ; v1(2070,1565) 1962.93,1565 1960,1562.07 1960,1501.89 1916.61,1458.5 Y1.1 1878.5,1458.5 1860,1440 1860,1309.57
  Bottom Layer w5: v1(2070,1565) 2070,1765 2290.95,1985.95 2560.95,1985.95 P3.4
RESET: C14.1 R6.2 SW1.B1 SW1.B2 U2.7 | length 1240.5
  Top Layer w5: SW1.B1 SW1.B2 1430.2,1586.42 R6.2 1440.91,1581.61 1459.07,1563.44 1459.07,1557.93 1462,1555 v1(1555,1555) ; C14.1 1488.46,1721.34 1561.02,1648.78 1561.02,1568.19 1555,1562.17 v1(1555,1555) ; U2.7 1660.16,1215.31 1700,1255.15 1700,1410 v1(1555,1555)
SWCLK: P2.2 U2.37 | length 963.1
  Top Layer w5: U2.37 1853.33,891.73 1885,860.06 1885,490 1970,405 2275,405 P2.2
SWDIO: P2.3 U2.34 | length 1120.1
  Top Layer w5: U2.34 1738.9,688.9 1635,585 1635,405 1655,385 2198.94,385 2250,333.94 P2.3
VBAT: P3.1 U2.1 | length 1967.3
  Top Layer w5: U2.1 1778.27,1163.15 1781.41,1160 v1(1835,1160)
  Bottom Layer w5: v1(1835,1160) 1866.81,1191.81 2191.81,1191.81 2360,1360 2360,1780 2450,1870 2775,1870 3048.93,2143.93 3048.93,2173.93 P3.1
VCC: C4.2 C5.2 C6.2 CON1.1 R2.2 U.2 | length 568.1
  Top Layer w5: CON1.1 3535,1689.57 C4.2 C5.2 C6.2 R2.2 3538.39,1550.83 3585,1504.21 U.2
VCC3V3: C12.1 C13.2 C15.1 C16.2 C17.2 C18.2 C19.2 D2.1 D3.1 P1.1 P1.2 P2.4 P3.18 P4.1 P5.8 P6.1 P7.1 P8.1 P9.1 P10.1 R6.1 R12.1 R13.1 U1.2 U1.4 U2.9 U2.24 U2.36 U2.48 U3.12 U4.2 U5.8 | length 12225.3
  Top Layer w5: U3.12 130,1309.41 128,1307.41 128,1112 405,835 P5.8 1354.57,835 C16.2 1464.57,819.57 1503.66,858.66 U2.24 1665,891.73 ; v1(1160,1840) 1153.82,1840 1143.82,1830 1015,1830 950,1765 950,1690 1010,1630 1406.61,1630 R6.1 1511.61,1658.39 v1(1534.77,1635.23) ; v1(1520,1455) 1599.57,1375.43 1599.57,1223.82 1617.51,1205.88 1617.51,1194.1 1620.79,1190.82 U2.9 1620.79,1119.21 1631.73,1108.27 1788.27,1108.27 ; v1(1840,625) 1840,705.43 1835.43,710 1835.43,753.86 1778.27,811.02 U2.36 1778.27,872.46 1760,890.73 1759.12,891.45 1757.94,891.73 1665,891.73 ; C15.1 2279.57,465.91 2365,551.34 v1(2365,625) ; R12.1 2150,1383.39 ; P4.1 2800,115 3185,500 U1.2 U1.4 3185,1107.48 3092.48,1200 C12.1 3103.82,1212.33 3142.33,1212.33 3225,1295 3225,1331.57 C13.2 3211.57,1339.09 3162.48,1290 3104.65,1290 D2.1@3051.61,1343.03 ; U5.8 2850,1110 3049.41,1309.41 3051.61,1338.89 D2.1@3051.61,1343.03 ; P1.1 2985,1555 ; 1665,891.73 1665,985 1788.27,1108.27 ; 1788.27,1108.27 U2.48 1857.13,1108.27 1860.28,1111.41 1860.28,1111.62 1924.09,1175.43 C18.2 1951.12,1154.31 1988.09,1154.31 2057.4,1085 U4.2 2130,1085 2150,1105 2150,1383.39 ; 2150,1383.39 D3.1 2116.58,1394.96 2116.58,1411.58 2210,1505 2605,1505 2655,1555 2985,1555 ; 2985,1555 P1.2 2985,1413.58 3051.61,1346.97 D2.1 D2.1@3051.61,1343.03
  Bottom Layer w5: P9.1 P10.1 ; P9.1@355.48,435.48 315,395 102.93,395 100,392.07 100,110 P8.1 P7.1 P6.1 ; P9.1@355.97,435 443.88,435 ; P9.1@363.88,450 748.88,835 P5.8 ; v1(1160,1840) 1355,2035 P3.18 ; v1(1520,1455) 1527.39,1462.39 1527.39,1627.84 v1(1534.77,1635.23) ; v1(1840,625) v1(2365,625) 2365,546.97 2150,331.97 P2.4
pads on no net: U3.3 U3.4 U3.5 U3.6 U3.7 U3.8 U3.9 U3.10 U3.11 U3.14 U3.15 U3.16 U3.17 U3.18 U3.19 U3.20 U3.23 U3.24 U3.25 U3.26 U3.27 U3.28 U3.29 U3.30 U3.33 U3.34 U4.1 U4.3 U4.4 Y1.2 Y1.4

## Polygon pours and split planes (outlines as drawn)
GND on Top Layer "GND_L01_P005" (solid, remove dead copper, pour order 5): 0,-10 0,2275 100,2275 100,2000 670,2000 670,2275 3985,2275 3985,-10
VCC3V3 on Top Layer "NONET_L-01_P-001" (solid, remove dead copper, pour order 4): 3125,835 3125,1075 3235,1075 3245,1065 3245,840 3135,840 3130,835 3125,840
5V on Top Layer "NONET_L-01_P-001" (solid, remove dead copper, pour order 3): 3670,1035 3930,1035 3945,1020 3945,865 3675,865 3665,875
VCC on Top Layer "NONET_L-01_P-001" (solid, remove dead copper, pour order 2): 3485,1760 3610,1760 3650,1760 3650,1550 3505,1550
VCC on Top Layer "NONET_L-01_P-001" (solid, remove dead copper, pour order 1): 3330,1870 3330,1720 3550,1720 3550,1715 3555,1710
GND on Bottom Layer "GND_L02_P006" (solid, remove dead copper, pour order 6): 0,-10 0,2275 100,2275 100,2000 670,2000 670,2275 3985,2275 3985,-10

## Keep-outs
Keep-Out Layer:
  the board outline again, w10

## Silkscreen, mask and mechanical layers (free items; w line width, h text height)
Top Overlay:
  text "5V" at 1464.42,2063.95 h30 r90
  text "PB1" at 1764.63,2057.85 h30 r90
  text "PA1" at 2564.63,2057.85 h30 r90
  text "3V3" at 1364.46,2057.01 h30 r90
  text "PB0" at 1864.46,2056.02 h30 r90
  text "PA7" at 1952.56,2056 h30 r90
  text "PA6" at 2057.23,2056 h30 r90
  text "PA5" at 2164.42,2055.93 h30 r90
  text "PA4" at 2264.58,2056.04 h30 r90
  text "PA3" at 2364.46,2056 h30 r90
  text "PA2" at 2464.63,2056.09 h30 r90
  text "PA0" at 2664.46,2056.02 h30 r90
  text "GND" at 1164.58,2051.33 h30 r90
  text "GND" at 1264.58,2051.33 h30 r90
  text "PB11" at 1564.63,2050.4 h30 r90
  text "PB10" at 1664.46,2048.57 h30 r90
  text "PC15" at 2764.58,2047.74 h30 r90
  text "PC14" at 2864.58,2047.85 h30 r90
  text "PC13" at 2964.58,2047.81 h30 r90
  text "VBAT" at 3064.58,2045.03 h30 r90
  text "BUSY" at 980,1510.33 h30
  text "RST" at 975,1425.42 h30
  text "DC" at 975,1325.42 h30
  text "SPI_CS" at 975,1227.91 h30
  text "SPI_SCK" at 975,1127.91 h30
  text "SPI_MOSI" at 970,1027.91 h30
  text "GND" at 970,925.42 h30
  text "3V3" at 975,825.54 h30
  text "STOP ALARM" at 425,617.77 h30
  text "MENU MODE" at 420,432.77 h30
  text "3V3" at 2127.34,250.41 h30
  text "SWDIO" at 2205,249.87 h30
  text "SWCLK" at 2300,249.87 h30
  text "GND" at 2421.66,250.28 h30
  text "5V" at 2434.42,200.3 h30 r90
  text "3V3" at 2634.46,193.37 h30 r90
  text "PA8" at 1137.23,192.34 h30 r90
  text "PA9" at 1234.46,192.34 h30 r90
  text "PB3" at 1734.46,192.35 h30 r90
  text "PB4" at 1834.58,192.4 h30 r90
  text "PB5" at 1937.23,192.29 h30 r90
  text "PB6" at 2034.46,192.35 h30 r90
  text "PB7" at 2134.58,192.35 h30 r90
  text "PB8" at 2234.46,192.34 h30 r90
  text "PB9" at 2334.46,192.34 h30 r90
  text "GND" at 2534.58,187.69 h30 r90
  text "PA11" at 1434.63,186.76 h30 r90
  text "PB12" at 734.63,185 h30 r90
  text "PB13" at 834.46,184.9 h30 r90
  text "PB14" at 934.63,184.94 h30 r90
  text "PB15" at 1034.46,184.83 h30 r90
  text "PA10" at 1334.46,184.93 h30 r90
  text "PA12" at 1534.63,185 h30 r90
  text "PA15" at 1634.46,184.83 h30 r90
  text "UP" at 427.23,155 h30 r90
  text "DOWN" at 622.23,155 h30 r90
  text "ENTER" at 252.56,145 h30 r90

## Text inside footprints (layer, text, board x,y; h text height)
BT1: Mechanical 2 "ZONE FOR ADHESIVE FIXATION" at 3613.82,586.41 h40 r180
P3: Top Overlay "20" at 1060,2205 h40 r270; Top Overlay "1" at 3130,2165 h40; Top Overlay "10" at 2060,2245 h40
P4: Top Overlay "10" at 1749.8,48.07 h40 r180; Top Overlay "1" at 2629.72,48.07 h40 r180; Top Overlay "20" at 749.8,48.07 h40 r180
P5: Top Overlay "1" at 825,1530 h40; Top Overlay "8" at 835,825 h40 r90